# EAGLE board untitled (EAGLE 9.6.2)
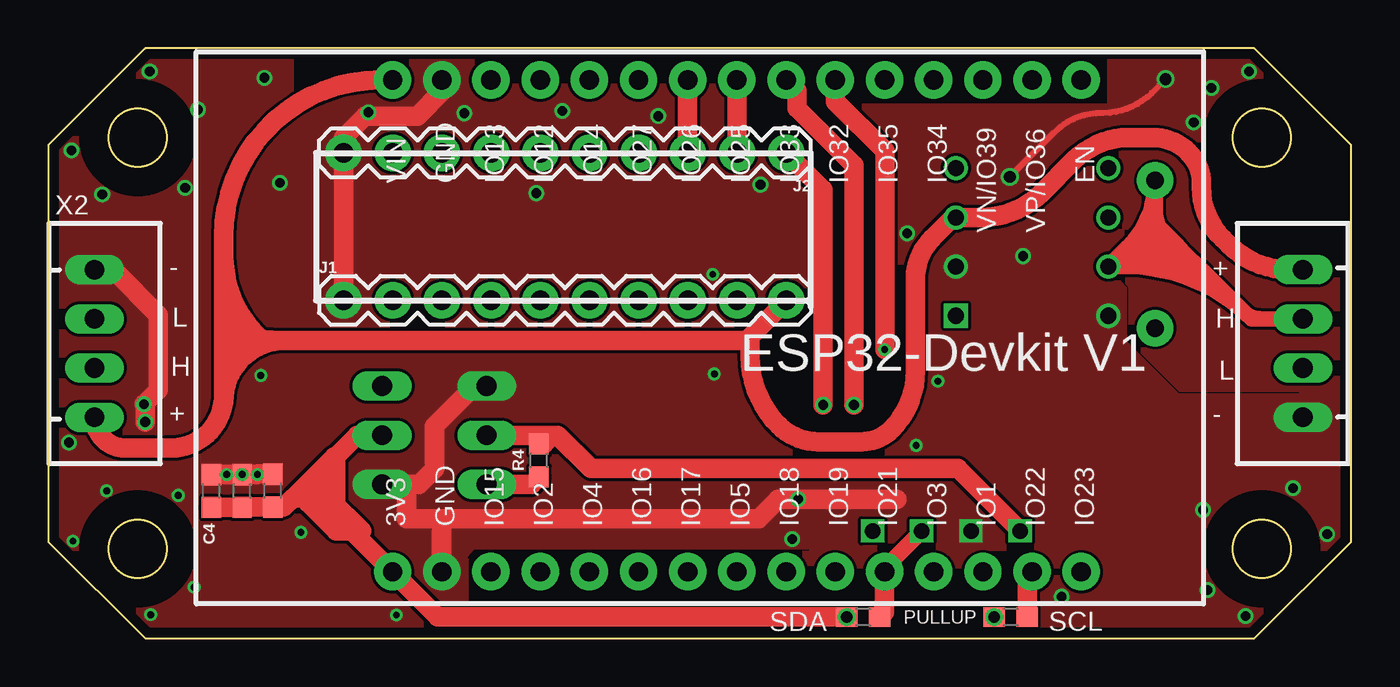
[diagram p0: board, top side]
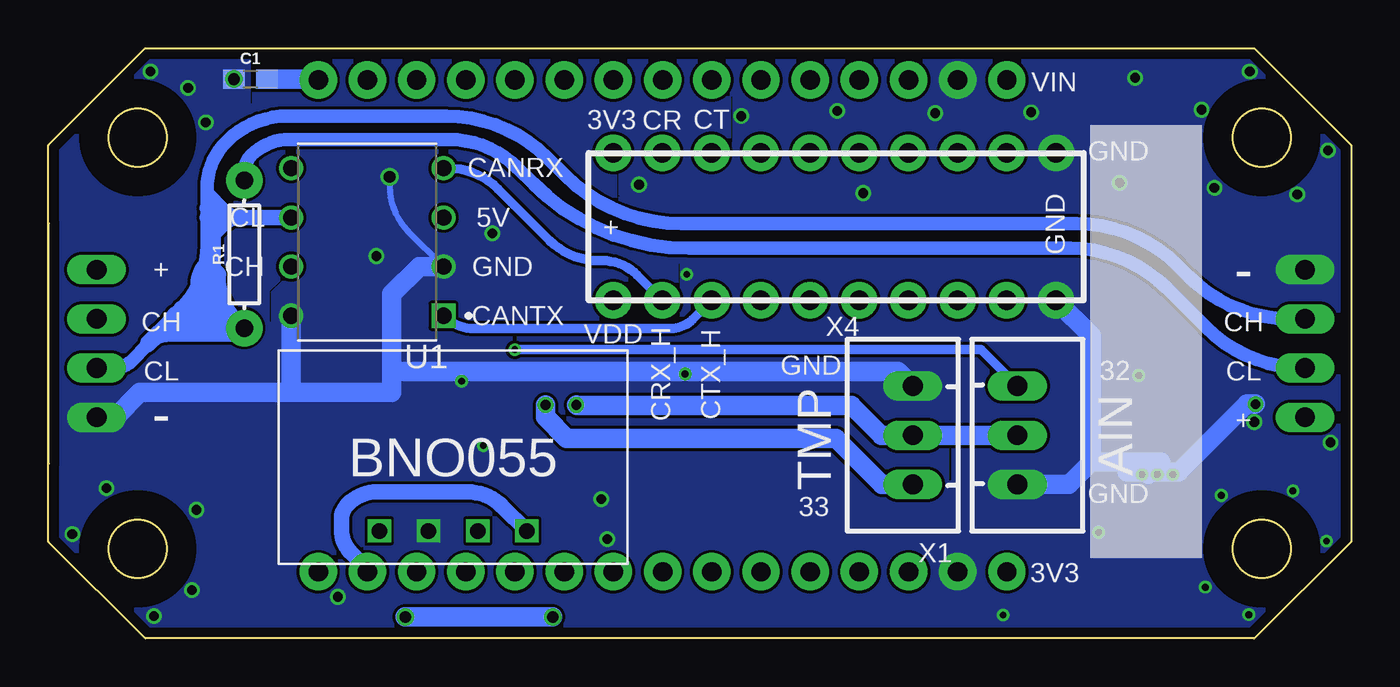
[diagram p1: board, bottom side, seen from below]

Size 67.26 x 30.48 mm. Coordinates in mm from the lower left corner, seen from the top.
Outline: 67.24,9.04 67.24,21.44
Outline: 5,30.48 0,25.48 0,5 5,0 62.26,0 67.26,5 67.26,25.48 62.26,30.48 5,30.48
Outline: circle at 4.62,25.86 radius 1.5
Outline: circle at 4.62,4.62 radius 1.5
Outline: circle at 62.64,25.86 radius 1.5
Outline: circle at 62.64,4.62 radius 1.5
Copper layers (1*16): Top 0.035mm / dielectric 1.6mm / Bottom 0.035mm
Design rules "Elecrow_2-layer_PCB_eagle_rule": minimum track width 6mil, minimum drill 12mil, track to track 6mil, track to pad 6mil, pad to pad 6mil, via to via 8mil, smd to smd 0mil, copper to edge 20mil, drill to drill 10mil, minimum pad ring 6mil, minimum via ring 6mil, stop-mask expansion 0mil, vias tented up to drill 100mil, thermal gap 10mil
Net classes: 1 lev3: clearance 0.5 mm
tRestrict: area 1.6,22.9 to 7.6,28.9; area 1.6,1.6 to 7.6,7.6; area 59.6,1.6 to 65.6,7.6; area 59.6,22.9 to 65.6,28.9; 15 lines
bRestrict: area 1.6,22.9 to 7.6,28.9; area 1.6,1.6 to 7.6,7.6; area 59.6,1.6 to 65.6,7.6; area 59.6,22.9 to 65.6,28.9; 9 lines

## Footprints (pad centres in the part's own frame; a part is rotated, then mirrored left to right if it is on the bottom)
0603 = smd 1.1 x 1: 1 -0.85,0; 2 0.85,0
1X10 = drill 1.016 pad 1.88: 1 0,0; 2 2.54,0; 3 5.08,0; 4 7.62,0; 5 10.16,0; 6 12.7,0; 7 15.24,0; 8 17.78,0; 9 20.32,0; 10 22.86,0
AXIAL-0.3 = drill 0.9 pad 1.88: P$1 -3.81,0; P$2 3.81,0
DIP787W45P254L1016H533Q8 = drill 0.83 square: 1 -3.937,3.81 | drill 0.83: 2 -3.937,1.27; 3 -3.937,-1.27; 4 -3.937,-3.81; 5 3.937,-3.81; 6 3.937,-1.27; 7 3.937,1.27; 8 3.937,3.81
ESP32-DEVKITV1 = drill 1 pad 1.93: 3V3 -16.52,-12.27; D1 13.96,-12.27; D2 -8.9,-12.27; D3 11.42,-12.27; D4 -6.36,-12.27; D5 1.26,-12.27; D12 -8.9,13.135; D13 -11.44,13.135; D14 -6.36,13.135; D15 -11.44,-12.27; D16 -3.82,-12.27; D17 -1.28,-12.27; D18 3.8,-12.27; D19 6.34,-12.27; D21 8.88,-12.27; D22 16.5,-12.27; D23 19.04,-12.27; D25 1.26,13.135; D26 -1.28,13.135; D27 -3.82,13.135; D32 6.34,13.135; D33 3.8,13.135; D34 11.42,13.135; D35 8.88,13.135; D36 16.5,13.135; D39 13.96,13.135; EN 19.04,13.135; GND@1 -13.98,13.135; GND@2 -13.98,-12.27; VIN -16.52,13.135
AE-BNO055-BO = drill 0.8 square: GND -1.27,-3.81; SCL 3.81,-3.81; SDA 1.27,-3.81; VIN -3.81,-3.81
JST-XH-03-PACKAGE-LONG-PAD = drill 1.016 long: 1 -2.54,0; 2 0,0; 3 2.54,0
JST-XH-04-PACKAGE-LONG-PAD = drill 1.016 long: 1 -3.81,0; 2 -1.27,0; 3 1.27,0; 4 3.81,0

## Placement (x,y rotation side)
C1  4.7uF  [0603]  56.83,28.89 0 bottom
C2  4.7uF  [0603]  10,7.62 90 top
C3  4.7uF  [0603]  11.59,7.64 90 top
C4  4.7uF  [0603]  8.41,7.62 90 top
J1  [1X10]  15.24,17.46 0 top
J2  [1X10]  38.1,25.08 180 top
R1  120Ω  [AXIAL-0.3]  57.15,19.84 90 bottom
R2  1k  [0603]  49.69,1.11 180 top
R3  1k  [0603]  42.07,1.11 180 top
R4  4.7k  [0603]  25.33,9.2 90 top
U1  MCP2562-E/P  [DIP787W45P254L1016H533Q8]  50.8,20.48 180 bottom
U$1  ESP32DEVKITV1  [ESP32-DEVKITV1]  34.29,15.72 0 top
U$3  [AE-BNO055-BO]  46.37,9.37 0 bottom
X1  JST-XH-03-PIN-LONG-PAD  [JST-XH-03-PACKAGE-LONG-PAD]  22.63,10.5 90 bottom
X2  JST-XH-04-PIN-LONG-PAD  [JST-XH-04-PACKAGE-LONG-PAD]  2.38,15.24 270 top
X3  JST-XH-04-PIN-LONG-PAD  [JST-XH-04-PACKAGE-LONG-PAD]  64.77,15.24 90 top
X4  JST-XH-03-PIN-LONG-PAD  [JST-XH-03-PACKAGE-LONG-PAD]  17.23,10.5 270 bottom

## Library data of the parts
C1-C4 = SparkFun-Capacitors; PROD_ID: CAP-08280
J1 J2 = SparkFun-Connectors; PROD_ID: CONN-11563
R1 = SparkFun-Resistors
R2 R3 = SparkFun-Resistors; PROD_ID: RES-07856
R4 = SparkFun-Resistors; PROD_ID: RES-07857
U1 = MCP2562-E_P; AVAILABILITY: In Stock; DESCRIPTION: 1/1 Transceiver Half CANbus 8-PDIP; MF: Microchip; MP: MCP2562-E/P; PACKAGE: DIP-8 Microchip; PRICE: None; PURCHASE-URL: https://pricing.snapeda.com/search/part/MCP2562-E/P/?ref=eda
U$1 = ESP32-DEVKITV1
U$3 = AE-BNO055
X1-X4 = JST XH Connectors

## Nets
1WIRE [lev3]: R4.1 U$1.D33 X1.1
3V3: C2.1 C3.1 C4.1 J2.1 R2.2 R3.2 R4.2 U$1.3V3 U$3.VIN X1.2 X4.2
AIN: U$1.D32 X4.1
CAN_RX [lev3]: J2.2 U$1.D25
CAN_RX_5V: J1.9 U1.4
CAN_TX [lev3]: J2.3 U$1.D26
CAN_TX_5V: J1.8 U1.1
CANH [lev3]: R1.P$2 U1.7 X2.3 X3.3
CANL [lev3]: R1.P$1 U1.6 X2.2 X3.2
EN: C1.2 U$1.EN
GND: C1.1 C2.2 C3.2 C4.2 J1.1 J2.10 U1.2 U1.8 U$1.GND@1 U$1.GND@2 U$3.GND X1.3 X2.1 X3.1 X4.3
N$7: U1.5
SCL [lev3]: R2.1 U$1.D22 U$3.SCL
SDA [lev3]: R3.1 U$1.D21 U$3.SDA
VDD_5V: J1.10 U1.3 U$1.VIN X2.4 X3.4

## Tracks (layer width: path | path; a pad name or v marks a point on that pad's centre or on a via)
1WIRE  (via drill 0.5)
  Top 1: U$1.D33 38.66,28.29 38.66,27.4 41.59,24.46 v41.59,12.06 | R4.1 24.94,7.96 X1.1
  Bottom 1: X1.1 24.21,7.96 26.6,10.34 40.5,10.34 41.59,11.44 v41.59,12.06
3V3  (via drill 0.5, 0.6)
  Top 1: v40.01,12.06 40.01,23.18 J2.1 | 14.84,8.43 14.84,7.17 14.55,7.17 | 14.84,8.43 14.84,9.39 | X4.2 15.95,10.5 14.84,9.39 | U$3.VIN 46.96,8.77 28.03,8.77 26.3,10.5 26.03,10.5 | R3.2 20.11,1.11 U$1.3V3 15.66,5.56 | 14.55,7.17 16.16,5.56 15.66,5.56 | 12.63,7.27 14.45,7.27 14.55,7.17 | 14.84,9.39 14.75,9.39 12.63,7.27 | 12.63,7.27 12.15,6.79 C3.1 10.02,6.79 C2.1 C4.1 | 14.55,7.17 13.58,7.17 | 14.84,8.43 13.58,7.17 | 13.58,7.17 13.41,7 14.86,5.56 15.66,5.56 | X1.2 26.03,10.5 | R4.2 25.58,10.05 26.03,10.5
  Bottom 1: v40.01,12.06 39.98,12.04 25.79,12.04 24.26,10.5 X1.2 X4.2 | R2.2 R3.2
  other vias: 48.84,1.11 41.22,1.11
AIN  (via drill 0.35)
  Top 1: U$1.D32 40.63,27.74 43.18,25.19 v43.18,14.92
  Bottom 0.5: X4.1 19.11,14.92 v43.18,14.92
CAN_RX
  Top 1: U$1.D25 35.55,25.09 J2.2
CAN_RX_5V
  Bottom 0.5: J1.9 36.87,18.78 arc-45 38.67,19.52 38.87,19.52 arc45 41.38,20.56 44.04,23.22 arc-45 46.62,24.29 U1.4
CAN_TX
  Top 1: U$1.D26 33.01,25.09 J2.3
CAN_TX_5V
  Bottom 0.5: J1.8 34.01,16.48 arc45 35.13,16.01 45.27,16.01 arc45 U1.1
CANH
  Top 0.152: R1.P$2 57.5,23.5 57.15,23.5
  Top 0.8: 55.74,20.21 arc45 57.15,23.61 57.15,23.5 57.15,21.96 | 57.52,21.06 arc-45 57.15,21.96 | 59.37,19.21 61.7,16.88 arc45 62.6,16.51 X3.3 62.13,16.51 arc45 55.62,19.21 U1.7 | 59.37,19.21 58.74,19.84 | 58.74,19.84 58.34,20.24 | 58.34,20.24 57.52,21.06 | U1.7 55.74,20.21 | U1.7 55,19.47 arc-45 55.9,19.84 57.31,19.84 | 57.31,19.84 58.74,19.84 | 59.37,19.21 58.47,19.21 arc-45 57.57,19.58 57.31,19.84 | 58.34,20.24 55.81,20.24 arc45 55.74,20.21 | 55.74,20.21 56.15,20.21 arc45 57.05,20.58 | 57.05,20.58 57.52,21.06 | 57.15,21.96 arc45 57.05,21.71 57.05,20.58
  Bottom 0.152: R1.P$2 57,24 57.15,24.08
  Bottom 0.7: X2.3 2.41,13.97 arc45 7.51,16.08 9.53,18.1 arc-45 14.51,20.16 34.19,20.16 arc45 42.22,23.49 43.04,24.31 arc-45 46.59,25.78 54.83,25.78 arc-45 56.78,24.97 arc-45 57.15,24.08
CANL
  Top 0.8: 57.41,16.3 R1.P$1 57.31,16.2
  Bottom 0.152: R1.P$1 57.5,16 57.44,16.33
  Bottom 0.7: X2.2 3.11,16.51 arc45 8.37,18.69 8.94,19.25 arc-45 14.19,21.43 34.57,21.43 arc45 40.59,23.93 41.48,24.81 arc-45 46.73,26.99 54.9,26.99 arc-45 58.07,25.68 arc-45 59.07,23.25 59.07,23.02 | X3.2 63.87,13.97 arc-45 62.97,14.34 62.15,15.16 62.15,15.32 60.96,16.51 60.8,16.67 60.42,17.05 arc-45 59.07,20.3 | 59.07,20.3 59.07,19.4 | 59.07,20.3 59.07,20.48 | 59.07,20.48 59.07,21.75 59.07,22.23 59.07,23.02 | 58.05,16.93 57.44,16.33 arc45 58.46,18.79 | 57.28,21.75 arc45 58.17,22.12 59.07,23.02 | U1.6 57.28,21.75 | 57.28,21.75 arc-45 58.17,21.38 58.75,20.8 59.07,20.48
  Bottom 0.8: U1.6 59.07,21.75 | 59.07,22.23 arc45 58.75,21.44 58.75,20.8 58.75,17.48 arc45 59.07,16.7 59.07,16.98 | 57.47,15.72 61.13,15.72 arc-45 61.92,15.39 62.15,15.16 | 57.41,16.3 arc-45 57.93,16.51 60.96,16.51 | 60.8,16.67 arc45 60.16,16.93 59.37,16.93 | 59.37,16.93 59.05,16.93 | 59.37,16.93 59.53,17 | 59.53,17 arc-45 59.66,17.05 60.42,17.05 | 59.07,19.4 arc-45 59.53,18.29 59.53,17 | 58.05,16.93 59.05,16.93 | 59.07,19.4 59.07,16.98 | 59.07,16.98 arc-45 59.05,16.93 | 59.07,19.4 58.46,18.79
  Bottom 1: R1.P$1 57.47,15.72
EN
  Bottom 1: C1.2 53.33,28.89 U$1.EN
GND  (via drill 0.35, 0.5, 0.6)
  Top 0.3: C1.1 56.96,28.17 arc-45 54.48,27.15 54.41,27.15 arc45 51.9,26.11 v49.64,23.85
  Top 1: J1.1 J2.10 15.24,25.88 16.35,26.99 19.05,26.99 20.31,28.25 U$1.GND@1 | X1.3 21.99,13.04 19.93,10.98 19.93,8.76 19.14,7.96 X4.3 18.49,7.96 18.49,6.18 20.31,6.18 | 20.31,6.18 U$1.GND@2 | X2.1 3.33,19.05 5.68,16.71 5.68,12.84 v4.94,12.1 5,12.04 v5,11.18 | C3.2 10.81,8.49 v10.79,8.47 C2.2 C4.2 | 20.31,6.18 36.66,6.18 37.66,7.18 43.82,7.18
  Bottom 0.3: v49.64,23.85 49.64,23.35 arc-45 48.68,21.03 U1.2
  Bottom 1: J1.1 13.42,15.64 13.42,9.11 | 13.42,9.11 14.57,7.96 X4.3 | X1.3 23.39,13.8 49.53,13.8 | 13.42,9.11 9.82,9.11 10.46,8.47 | v4.94,12.1 5.4,12.1 8.89,8.61 11.59,8.61 | 54.74,12.7 49.53,12.7 49.53,13.8 | 54.74,12.7 U1.8 | U1.2 48.1,19.21 49.53,17.78 49.53,13.8 | X3.1 63.82,11.43 62.55,12.7 54.74,12.7
  other vias: 57.68,28.89 10,8.47 9.21,8.47 1.2,25.21 2.78,22.94 7.06,23.28 5.23,29.29 7.73,27.31 1.06,10.12 11.96,23.53 11.15,28.96 25.19,23 36.77,23.44 50.33,19.75 61.82,1.16 59.85,2.49 59.62,6.64 64.26,7.77 66.03,5.38 59.14,26.65 60.05,28.43 61.99,29.28 34.38,13.66 5.29,1.23 7.53,2.65 6.71,7.39 3,7.62 1.26,5.03 38.72,7.19 44.8,9.97 34.3,18.81 31.49,26.98 45.92,13.29 44.34,20.92 21.47,27.13 16.53,27.18 26.53,27.25 10.96,13.59 52.32,2.15 38.41,5.13 17.96,1.21 13.04,5.48
  pour Bottom (no thermals): -2.62,33.18 -2.62,-2.22 71.64,-2.22 71.64,33.18
  pour Top (no thermals): -3.73,33.81 -3.73,-1.43 74.14,-1.43 74.14,33.81
SCL
  Top 1: R2.1 50.54,3.19 U$1.D22
  Bottom 0.8: U$3.SCL 43.83,6.83 arc-45 45.62,7.57 50.3,7.57 arc-45 51.79,6.95 arc-45 52.13,6.14 52.13,5.59 arc-45 51.66,4.46 50.79,3.59 U$1.D22
SDA
  Top 0.8: U$3.SDA 43.17,3.63 U$1.D21
  Top 1: U$1.D21 43.17,1.47 42.92,1.22 R3.1 43.17,1.36 U$1.D21
VDD_5V
  Top 1: J1.10 36.04,15.4 | X2.4 arc90 3.97,9.84 6.35,9.84 arc90 9.05,12.54 | U$1.VIN 17.14,28.85 arc90 9.05,20.75 9.05,19.64 | 9.05,12.54 9.05,12.22 arc-90 12.22,15.4 | 9.05,12.54 9.05,14.13 | 9.05,14.13 9.05,15.4 | 9.05,15.4 9.05,19.64 | 36.04,15.4 36.24,15.4 36.24,14.59 arc45 37.72,11 arc45 39.74,10.16 41.99,10.16 arc45 43.53,10.8 arc45 44.77,13.79 44.77,18.6 arc-45 45.62,20.67 46.7,21.75 U1.3 48.19,21.75 arc45 51.29,23.04 52.96,24.7 arc-45 55.79,25.88 57.02,25.88 arc-45 58.87,25.11 58.9,25.08 arc-45 59.53,23.55 59.53,23.31 arc45 60.63,20.64 60.94,20.34 arc45 64.05,19.05 X3.4 | 36.04,15.4 12.22,15.4 | 9.05,19.64 arc47 11.02,15.41 9.68,16.03 9.89,15.82 | 9.89,15.82 10.16,15.56 9.65,15.48 | 9.65,15.48 9.05,15.4 | 9.89,15.82 9.05,14.13 | 12.22,15.4 9.65,15.48

## Text on the board
tPlace: - | + | L | H | H | L | + | - | SDA | PULLUP | SCL
bPlace: VIN | CT | CR | 3V3 | GND | CANRX | 5V | CL | GND | + | - | GND | CH | + | CANTX | CH | VDD | CH | CL | 32 | GND | CTX_H | CRX_H | CL | - | + | AIN | TMP | GND | 33 | 3V3
bStop: LoggerV1